# EAGLE board CM4_shield (EAGLE 9.6.2)
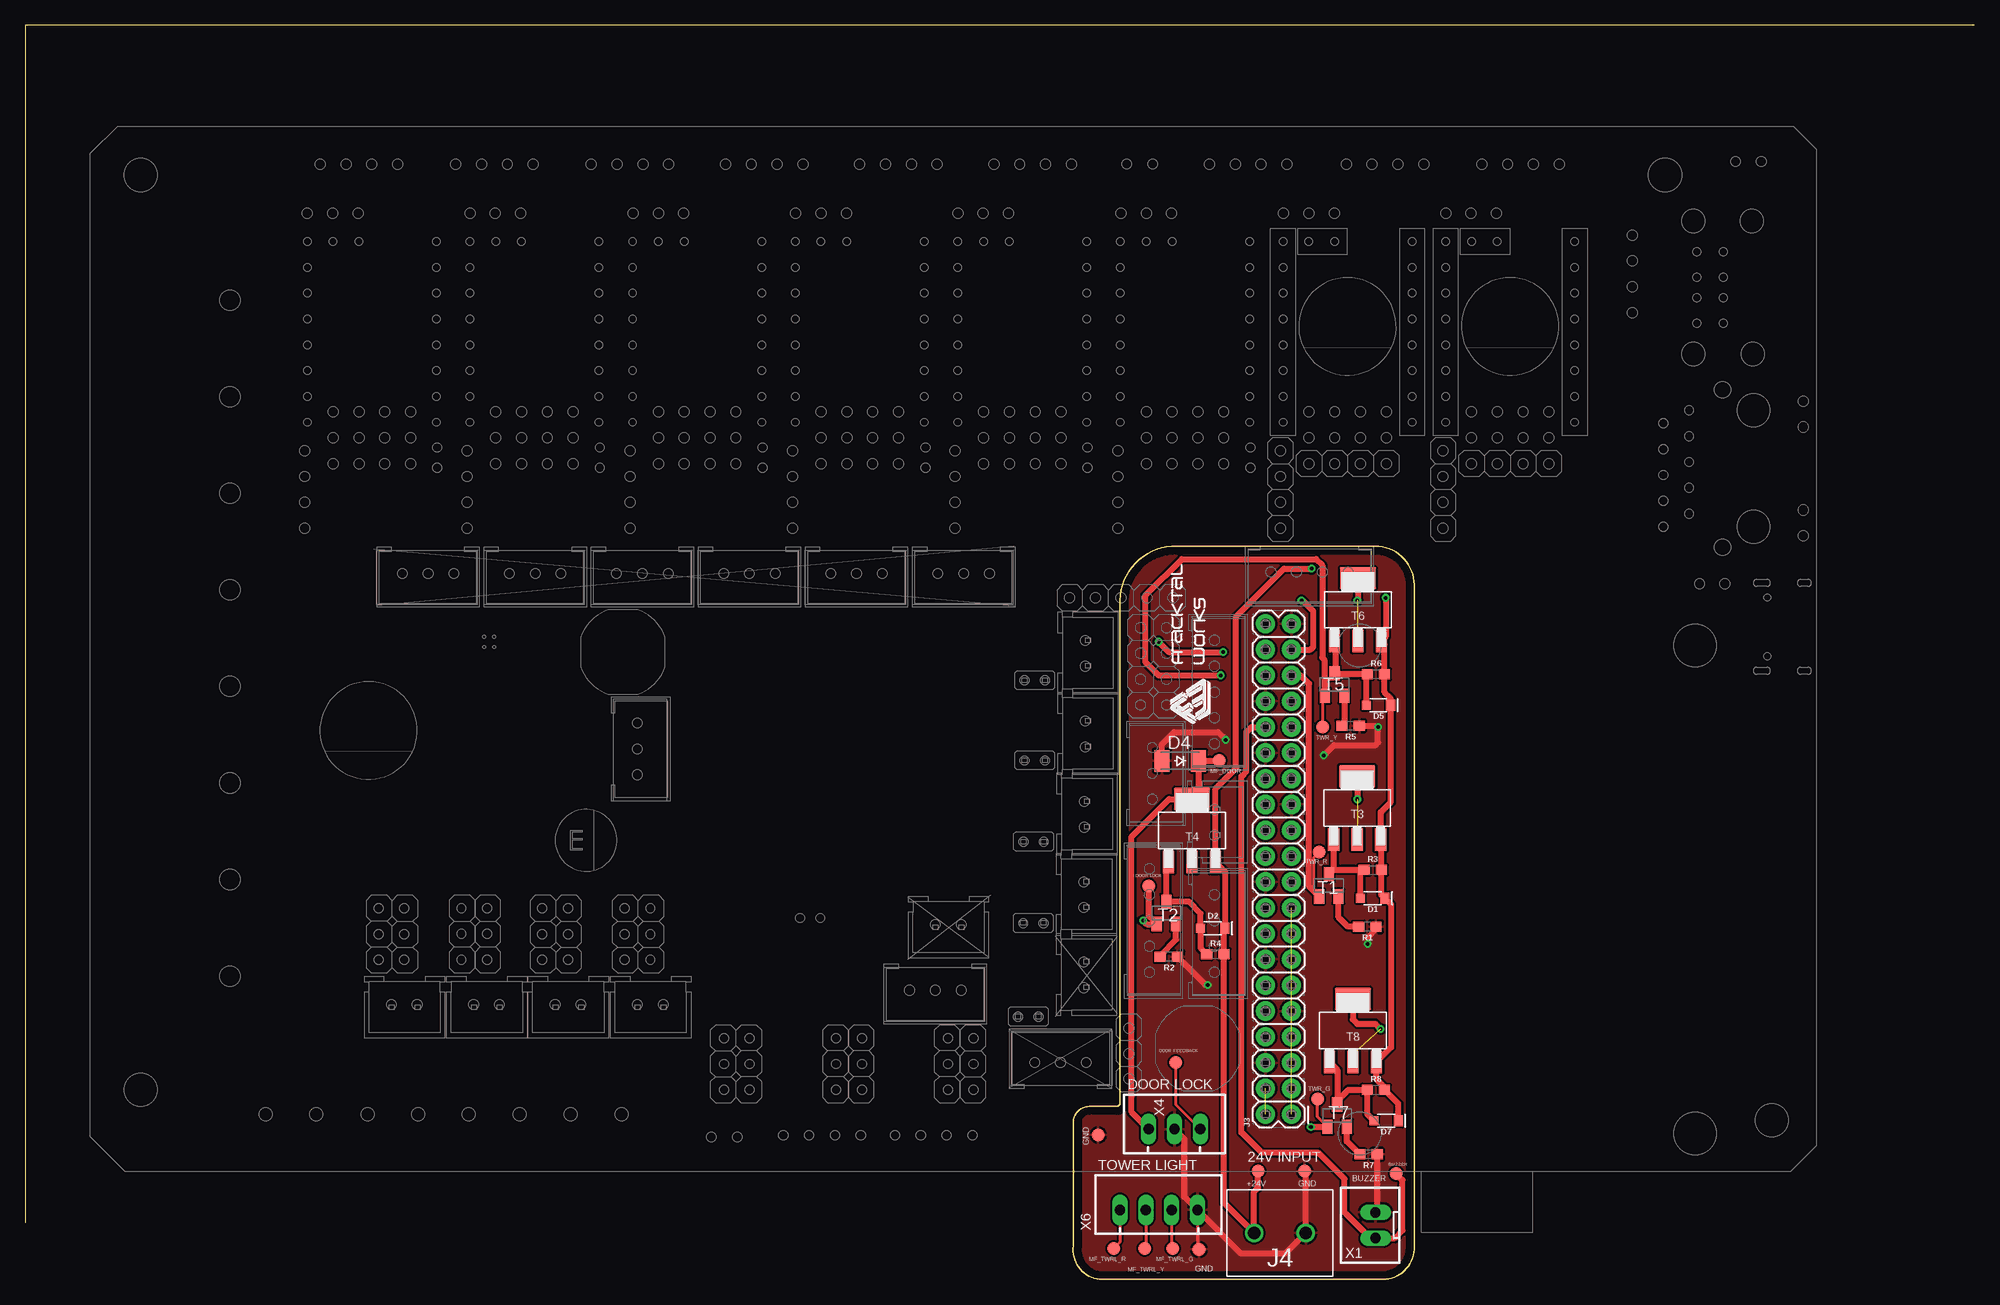
[diagram p0: board, top side]
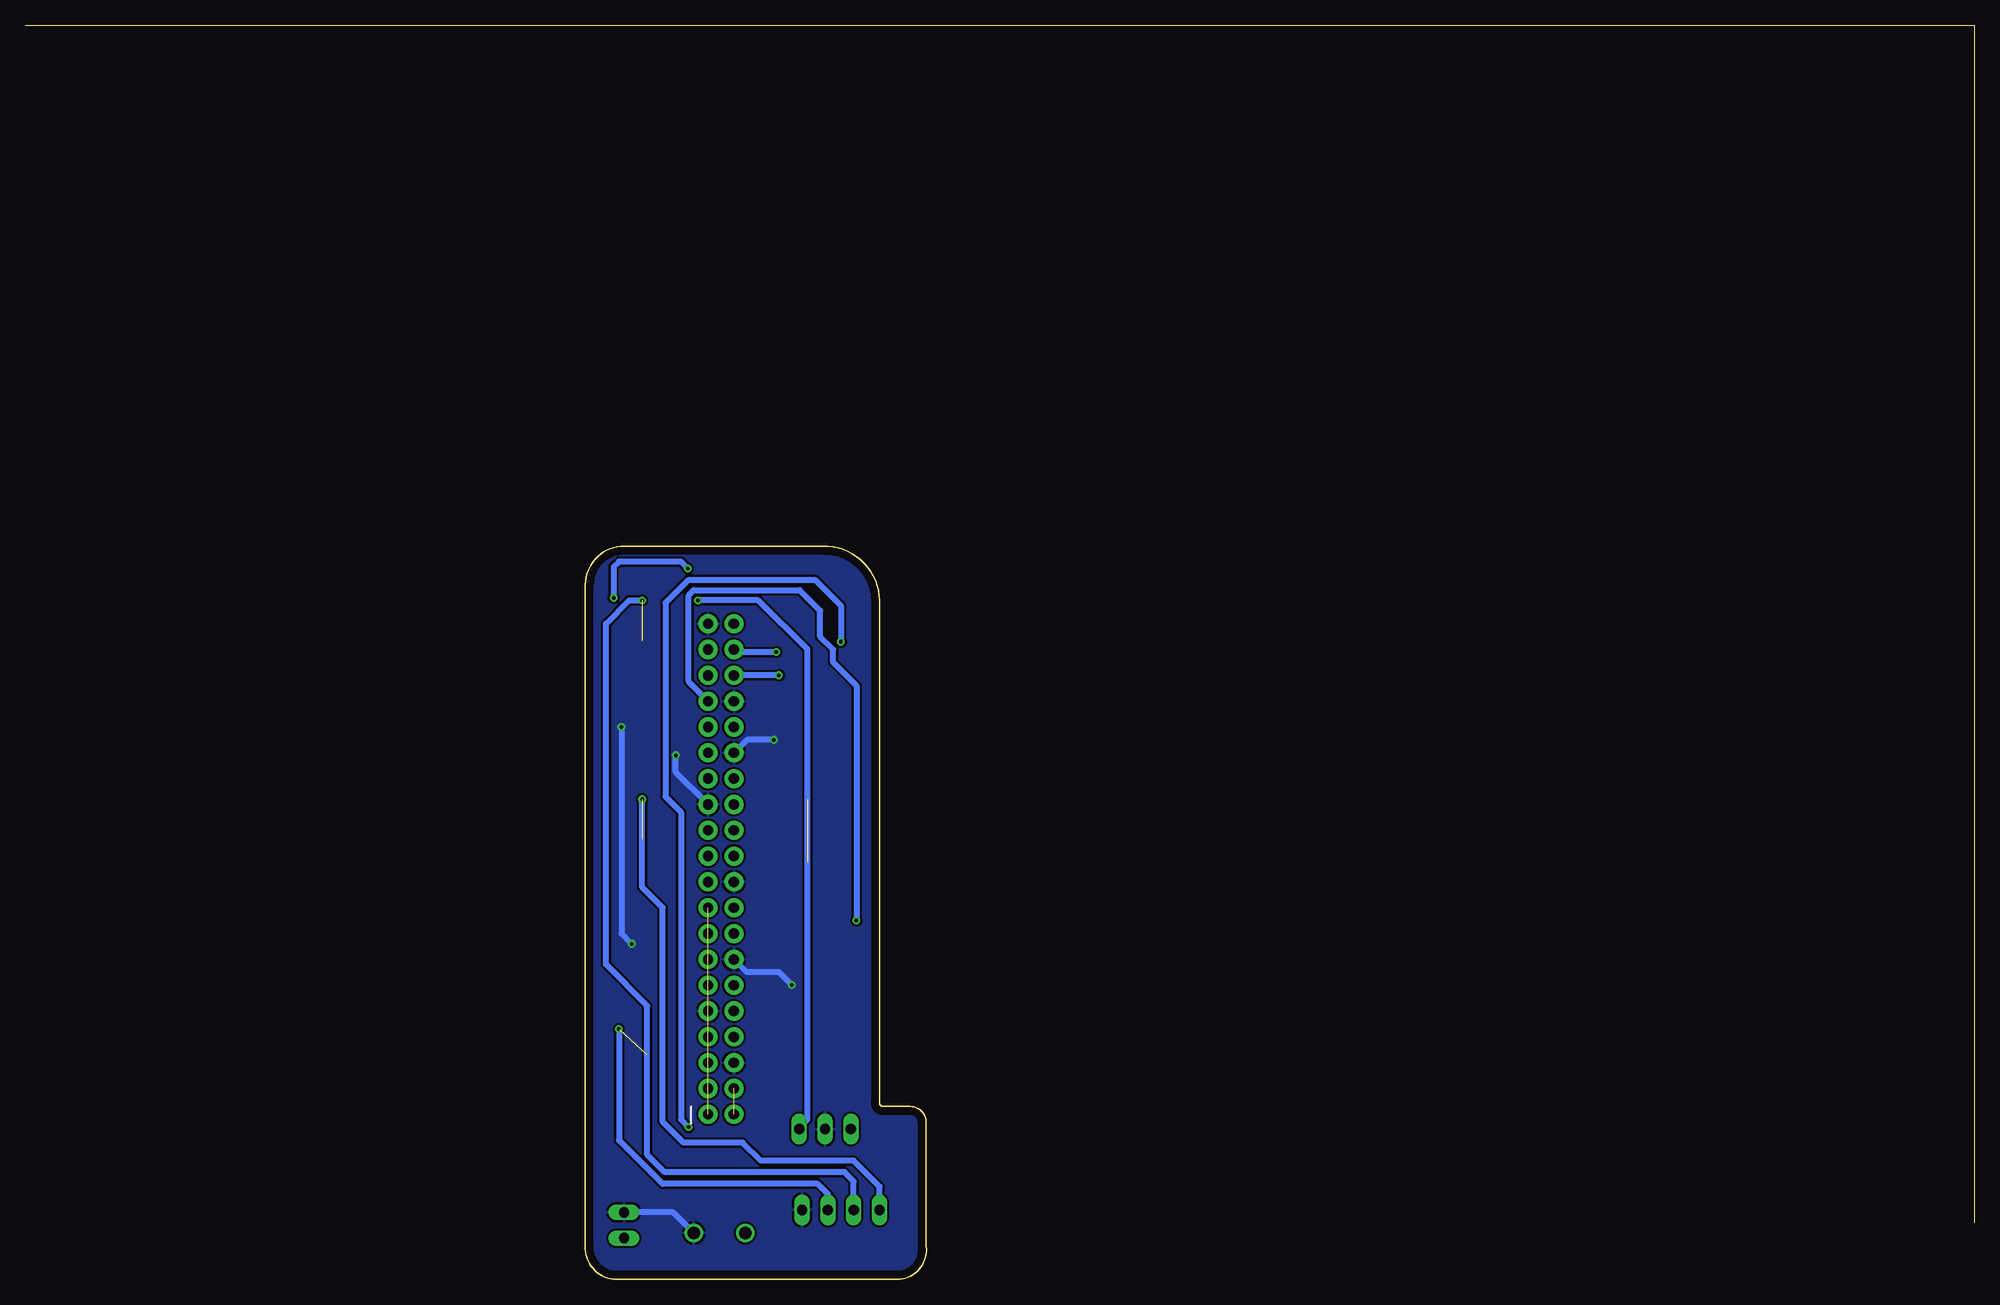
[diagram p1: board, bottom side, seen from below]

Size 191.75 x 123.37 mm. Coordinates in mm from the lower left corner, seen from the top.
Outline: 191.75,123.37 0,123.37 0,5.59
Outline: 113.28,72.14 arc90 107.7,66.8 107.7,17.53 arc-90 107.44,17.02 104.65,17.02 arc90 103.12,15.49 103.12,3.3 arc90 105.66,0 133.86,0 arc90 136.65,3.56 136.65,68.33 arc90 132.84,72.14 113.28,72.14
Copper layers (1*16): Top 0.035mm / dielectric 1.5mm / Bottom 0.035mm
Design rules "LionCircuits *": minimum track width 8mil, minimum drill 0.35mm, track to track 8mil, track to pad 8mil, pad to pad 8mil, via to via 8mil, smd to smd 8mil, copper to edge 30mil, drill to drill 10mil, minimum pad ring 10mil, minimum via ring 8mil, stop-mask expansion 4mil, vias tented up to drill 0mil, thermal gap 10mil

## Footprints (pad centres in the part's own frame; a part is rotated, then mirrored left to right if it is on the bottom)
PANASONIC_SMINI2-F5-B = smd 0.9 x 0.9: A 1.2,0 | smd 0.9 x 1.1: C -1.2,0
SOD-123_MINI-SMA = smd 1.5 x 2.1: A 1.8,0; C -1.8,0
2X20 = drill 1.016 pad 1.88: 1 0,0; 2 0,2.54; 3 2.54,0; 4 2.54,2.54; 5 5.08,0; 6 5.08,2.54; 7 7.62,0; 8 7.62,2.54; 9 10.16,0; 10 10.16,2.54; 11 12.7,0; 12 12.7,2.54; 13 15.24,0; 14 15.24,2.54; 15 17.78,0; 16 17.78,2.54; 17 20.32,0; 18 20.32,2.54; 19 22.86,0; 20 22.86,2.54; 21 25.4,0; 22 25.4,2.54; 23 27.94,0; 24 27.94,2.54; 25 30.48,0; 26 30.48,2.54; 27 33.02,0; 28 33.02,2.54; 29 35.56,0; 30 35.56,2.54; 31 38.1,0; 32 38.1,2.54; 33 40.64,0; 34 40.64,2.54; 35 43.18,0; 36 43.18,2.54; 37 45.72,0; 38 45.72,2.54; 39 48.26,0; 40 48.26,2.54
TERMBLK_508-2N = drill 1.2: 1 0,0; 2 5.08,0
0603 = smd 1.1 x 1: 1 -0.85,0; 2 0.85,0
SOT23-BEC = smd 1 x 1.4: B -0.95,-1.1; C 0,1.1; E 0.95,-1.1
MOSFET_SOT223 = smd 2.235 x 1.219: 1 -3.099,2.311; 2 -3.099,0; 3 -3.099,-2.311 | smd 2.2 x 3.6: 4 3.099,0
PAD.03X.05 = smd 1.27 x 1.27: P$1 0,0
JST-XH-02-PACKAGE-LONG-PAD = drill 1.016 long: 1 -1.27,0; 2 1.27,0
JST-XH-03-PACKAGE-LONG-PAD = drill 1.016 long: 1 -2.54,0; 2 0,0; 3 2.54,0
JST-XH-04-PACKAGE-LONG-PAD = drill 1.016 long: 1 -3.81,0; 2 -1.27,0; 3 1.27,0; 4 3.81,0

## Placement (x,y rotation side)
D1  10V  [PANASONIC_SMINI2-F5-B]  132.57,37.5 180 top
D2  10V  [PANASONIC_SMINI2-F5-B]  116.84,34.54 180 top
D4  CGRM4007-G  [SOD-123_MINI-SMA]  113.63,51.01 180 top
D5  10V  [PANASONIC_SMINI2-F5-B]  133.14,56.5 180 top
D7  10V  [PANASONIC_SMINI2-F5-B]  133.89,15.61 180 top
J3  RASPBERRYPI-40-PIN-GPIO_PTH_NO_SHROUD  [2X20]  124.57,16.25 90 top
J4  2828XX-2282837-2  [TERMBLK_508-2N]  120.9,4.57 0 top
R1  220  [0603]  132.05,34.7 180 top
R2  220  [0603]  112.52,31.75 180 top
R3  100k  [0603]  132.57,40.29 0 top
R4  100k  [0603]  117.09,32 0 top
R5  220  [0603]  130.4,54.47 180 top
R6  100k  [0603]  132.89,59.55 0 top
R7  220  [0603]  132.16,12.3 180 top
R8  100k  [0603]  132.89,18.65 0 top
T1  [SOT23-BEC]  128.26,38.77 0 top
T2  [SOT23-BEC]  112.27,36.07 0 top
T3  [MOSFET_SOT223]  131.05,46.39 90 top
T4  [MOSFET_SOT223]  114.79,44.16 90 top
T5  [SOT23-BEC]  128.83,58.53 0 top
T6  [MOSFET_SOT223]  131.11,65.9 90 top
T7  [SOT23-BEC]  129.08,16.11 0 top
T8  [MOSFET_SOT223]  130.62,24.5 90 top
TP1  [PAD.03X.05]  127.28,42.03 0 top
TP2  [PAD.03X.05]  107.07,3.04 0 top
TP3  [PAD.03X.05]  134.87,10.41 0 top
TP4  [PAD.03X.05]  121.3,10.66 0 top
TP5  [PAD.03X.05]  127.65,54.35 0 top
TP6  [PAD.03X.05]  110.12,3.04 0 top
TP9  [PAD.03X.05]  127.14,17.78 0 top
TP10  [PAD.03X.05]  112.92,3.04 0 top
TP12  [PAD.03X.05]  125.87,10.66 0 top
TP13  [PAD.03X.05]  105.55,14.22 0 top
TP16  [PAD.03X.05]  110.55,38.7 0 top
TP17  [PAD.03X.05]  117.49,51.05 0 top
TP18  [PAD.03X.05]  113.17,21.33 0 top
TP19  [PAD.03X.05]  115.48,2.96 0 top
U$1  [FWLOGO_SMALL]  117.78,54.48 90 top
X1  JST-XH-02-PIN-LONG-PAD  [JST-XH-02-PACKAGE-LONG-PAD]  132.84,5.33 90 top
X4  DOOR LOCK  [JST-XH-03-PACKAGE-LONG-PAD]  113.06,14.79 0 top
X6  TOWER LIGHT  [JST-XH-04-PACKAGE-LONG-PAD]  111.51,6.85 0 top

## Library data of the parts
D1 D2 D5 D7 = SparkFun-DiscreteSemi; PROD_ID: DIO-12989
D4 = diode
J3 TP1-TP6 TP9 TP10 TP12 TP13 TP16-TP19 = SparkFun-Connectors
J4 = Connector; CATEGORY: Fixed Terminal Blocks; DESCRIPTION: Fixed Terminal Blocks 5.08MM PCB MOUNT 2P; MANUFACTURER: TE Connectivity AMP Connectors; MPN: 282837-2; OPERATING_TEMPERATURE: -40°C to +105°C; PART_STATUS: ACTIVE; PITCH: 0.200" (5.08mm); ROHS_COMPLIANCE: RoHS Compliant; SERIES: Buchanan; SUBCATEGORY: Terminal Blocks; TYPE: Through Hole; Screw - Rising Cage Clamp; Side wire entry, Horizontal with Board
R1-R8 = SparkFun-Resistors; PROD_ID: RES-07828
T1 T2 T5 T7 = transistor
T3 T4 T6 T8 = FracktalWorks
U$1 = FracktalWorks_Eagle_Library
X1 = Rembrandt Electronics - JST XH Connectors v1-0
X4 X6 = Rembrandt

## Nets
3.3V: J3.1 J3.17
5V: J3.2 J3.4
+24V: D1.C D2.C D5.C D7.C J4.1 R3.2 R4.2 R6.2 R8.2 T3.3 T4.3 T6.3 T8.3 TP4.P$1
BUZZER: J3.32 TP3.P$1 X1.1
DOOR_FEEDBACK: J3.37 TP18.P$1 X4.3
DOOR_LOCK: J3.33 T2.B TP16.P$1
GND: D4.A J3.6 J3.9 J3.14 J3.20 J3.25 J3.30 J3.34 J3.39 J4.2 R1.1 R2.1 R5.1 R7.1 TP12.P$1 TP13.P$1 TP19.P$1 X1.2 X4.2 X6.4
MF_DOOR: D4.C T4.2 T4.4 TP17.P$1 X4.1
MF_TWR_G: T8.2 T8.4 TP10.P$1 X6.3
MF_TWR_Y: T6.2 T6.4 TP6.P$1 X6.2
MF_TWRL_R: T3.2 T3.4 TP2.P$1 X6.1
N$1: R1.2 T1.E
N$3: D5.A R6.1 T5.C T6.1
N$4: D1.A R3.1 T1.C T3.1
N$8: R5.2 T5.E
N$9: D7.A R8.1 T7.C T8.1
N$10: R7.2 T7.E
N$13: D2.A R4.1 T2.C T4.1
N$14: R2.2 T2.E
TWR_G: J3.38 T7.B TP9.P$1
TWR_R: J3.35 T1.B TP1.P$1
TWR_Y: J3.36 T5.B TP5.P$1

## Tracks (layer width: path | path; a pad name or v marks a point on that pad's centre or on a via)
3.3V  (1 unrouted)
5V  (1 unrouted)
+24V  (via drill 0.35)
  Top 0.61: D7.C 135.09,17.3 R8.2 133.74,18.91 132.93,19.72 T8.3 134.37,22.83 134.37,36.9 D1.C 133.42,37.85 R3.2 133.42,43.22 T3.3 133.36,45.98 134.34,46.97 D5.C 134.34,57.17 133.74,57.78 R6.2 133.74,62.48 T6.3 133.86,63.23 v133.86,67.06 | v126.57,69.93 123.85,69.93 119.13,65.2 119.13,50.29 117.1,48.27 T4.3 118.04,40.13 D2.C 117.94,34.45 R4.2 117.94,7.53 J4.1 120.9,8.64 121.3,9.03 TP4.P$1
  Bottom 0.61: v126.57,69.93 127.25,70.61 133.35,70.61 133.86,70.1 v133.86,67.06
BUZZER
  Top 0.61: J3.32 120.64,54.35 120.14,53.85 120.14,49.98 119.63,49.47 119.63,14.48 121.67,12.45 127.25,12.45 129.79,9.91 129.79,6.6 132.33,4.06 X1.1 134.75,4.06 135.51,4.83 135.51,9.78 TP3.P$1
DOOR_FEEDBACK  (via drill 0.35)
  Top 0.305: TP18.P$1 113.17,17.23 X4.3
  Top 0.61: J3.37 126.46,61.97 126.72,62.23 126.72,65.75 125.67,66.8 v125.56,66.8
  Bottom 0.61: X4.3 115.6,14.95 114.81,15.75 114.81,61.98 119.63,66.8 v125.56,66.8
DOOR_LOCK  (via drill 0.35)
  Top 0.61: v109.98,35.31 110.32,34.97 T2.B 110.55,35.73 TP16.P$1
  Bottom 0.61: J3.33 126.49,58.81 126.49,67.31 125.98,67.82 115.57,67.82 113.54,65.79 113.54,63.25 112.27,61.98 112.27,60.71 109.98,58.42 v109.98,35.31
GND  (via drill 0.35)
  Top 0.305: X6.4 115.32,3.11 TP19.P$1
  Top 0.61: X4.2 114.05,13.81 114.05,8.13 X6.4 119.63,2.54 123.95,2.54 J4.2 125.98,10.66 TP12.P$1 | D4.A 111.83,52.65 113.03,53.85 117.35,53.85 v118.11,53.09 | R5.1 132.99,54.47 v133.1,54.36 133.1,52.83 132.84,52.58 128.78,52.58 v127.76,51.56 | v132.08,33.02 132.08,33.63 132.9,34.45 R1.1 | v116.33,28.96 116.17,28.96 R2.1 | R7.1 133.01,6.77 X1.2
  Bottom 0.61: v118.11,53.09 120.76,53.09 J3.30 | v133.1,54.36 133.1,34.04 v132.08,33.02 | J3.25 127.76,49.92 v127.76,51.56 | v116.33,28.96 117.6,30.23 120.77,30.23 J3.14 | J4.2 128.02,6.6 X1.2
  pour Top: 109.22,-0.25 105.92,-0.25 arc-90 102.87,2.79 102.87,7.62 102.87,15.24 arc-90 104.9,17.27 105.66,17.27 106.68,17.27 arc90 107.44,18.03 107.44,18.8 107.44,38.35 107.44,57.4 107.44,66.8 arc-90 113.03,72.39 115.32,72.39 132.33,72.39 arc-90 136.91,67.82 136.91,67.31 136.91,34.29 136.91,3.81 136.91,2.79 arc-90 133.86,-0.25
  pour Bottom: 111,-0.25 105.92,-0.25 arc-90 102.87,2.79 102.87,4.57 102.87,15.24 arc-90 104.9,17.27 106.68,17.27 arc90 107.44,18.03 107.44,20.07 107.44,39.88 107.44,66.8 arc-90 113.03,72.39 114.05,72.39 132.59,72.39 arc-90 136.91,68.07 136.91,66.04 136.91,47.75 136.91,23.62 136.91,6.86 136.91,3.05 arc-90 133.6,-0.25 132.08,-0.25
MF_DOOR  (1 unrouted)
  Top 0.61: X4.1 108.86,16.46 108.86,18.04 108.84,18.06 108.84,43.56 112.54,47.26 T4.4 115.43,47.9 D4.C 117.45,51.01 TP17.P$1
MF_TWR_G  (via drill 0.35)  (1 unrouted)
  Top 0.305: X6.3 112.78,3.18 TP10.P$1
  Top 0.61: T8.2 130.62,22.16 | T8.4 130.62,25.59 131.06,25.15 132.84,25.15 v133.35,24.64
  Bottom 0.61: X6.3 112.78,8.39 113.79,9.4 129.03,9.4 133.35,13.72 v133.35,24.64
MF_TWR_Y  (via drill 0.35)  (1 unrouted)
  Top 0.305: X6.2 110.24,3.17 TP6.P$1
  Top 0.61: 131.06,62.84 T6.2 | T6.4 131.11,66.85 v131.06,66.8
  Bottom 0.61: X6.2 110.24,9.66 111.13,10.55 128.85,10.55 130.56,12.25 130.56,26.92 134.62,30.99 134.62,64.52 132.33,66.8 v131.06,66.8
MF_TWRL_R  (via drill 0.35)  (1 unrouted)
  Top 0.305: X6.1 107.7,3.67 TP2.P$1
  Top 0.61: 131.06,43.3 T3.2 | T3.4 131.06,49.47 v131.06,47.24
  Bottom 0.61: X6.1 107.7,9.13 110.25,11.68 119.38,11.68 121.16,13.46 127,13.46 129.03,15.49 129.03,36.58 131.06,38.61 v131.06,47.24
N$1
  Top 0.61: R1.2 130.14,34.7 129.21,35.64 T1.E
N$3
  Top 0.61: D5.A 131.94,59.45 R6.1 128.91,59.55 | 128.91,59.55 T5.C | T6.1 128.91,62.69 128.91,59.55
N$4
  Top 0.61: D1.A 131.37,39.94 R3.1 128.68,40.29 T1.C 128.74,40.35 T3.1
N$8
  Top 0.61: T5.E 129.78,54.69 R5.2
N$9
  Top 0.61: D7.A 132.04,16.26 R8.1 130.16,18.65 129.08,17.57 T7.C 129.08,20.63 T8.1
N$10
  Top 0.61: R7.2 130.03,13.58 T7.E
N$13
  Top 0.61: T4.1 112.27,40.85 T2.C 114.47,37.17 115.64,36 D2.A 115.64,32.61 R4.1
N$14
  Top 0.61: R2.2 111.67,31.92 113.22,33.46 T2.E
TWR_G  (via drill 0.35)
  Top 0.305: T7.B 127.14,16 TP9.P$1
  Top 0.61: v126.49,14.99 126.52,15.01 T7.B | v111.51,62.74 112.52,61.72 v117.86,61.72
  Bottom 0.61: v126.49,14.99 127.25,15.75 127.25,45.97 128.78,47.5 128.78,66.55 126.49,68.83 114.05,68.83 111.51,66.29 v111.51,62.74 | v117.86,61.72 121.79,61.72 J3.38
TWR_R
  Top 0.305: TP1.P$1 126.77,41.52 126.77,38.2 T1.B
  Top 0.61: J3.35 125.48,59.43 126.3,58.61 126.3,38.67 T1.B
TWR_Y  (via drill 0.35)
  Top 0.305: T5.B 127.81,57.36 127.65,57.2 TP5.P$1
  Top 0.61: 127.81,57.36 127.81,60.97 127.61,61.17 127.61,70.26 127,70.87 113.79,70.87 110.24,67.31 110.24,60.71 111.51,59.43 v117.59,59.43 v117.6,59.44
  Bottom 0.61: v117.6,59.44 J3.36

## Text on the board
tNames: TWR_Y | MF_DOOR | TWR_R | DOOR LOCK | DOOR FEEDBACK | TWR_G | GND | 24V INPUT | BUZZER | BUZZER | +24V | GND | MF_TWRL_R | MF_TWRL_G | MF_TWRL_Y | GND
tValues: GND